# Altium PCB VMA_SAUVC26.PcbDoc
Units mm, origin at the board's own origin, x right, y up, seen from the top; angles counter-clockwise.
Board outline 50 x 35 mm, 4 copper layers (Top Layer 1, Top Layer, Bottom Layer, Bottom Layer 1), stack 1.502 mm thick; 96 components, 74 nets, 401 pads, 228 vias.
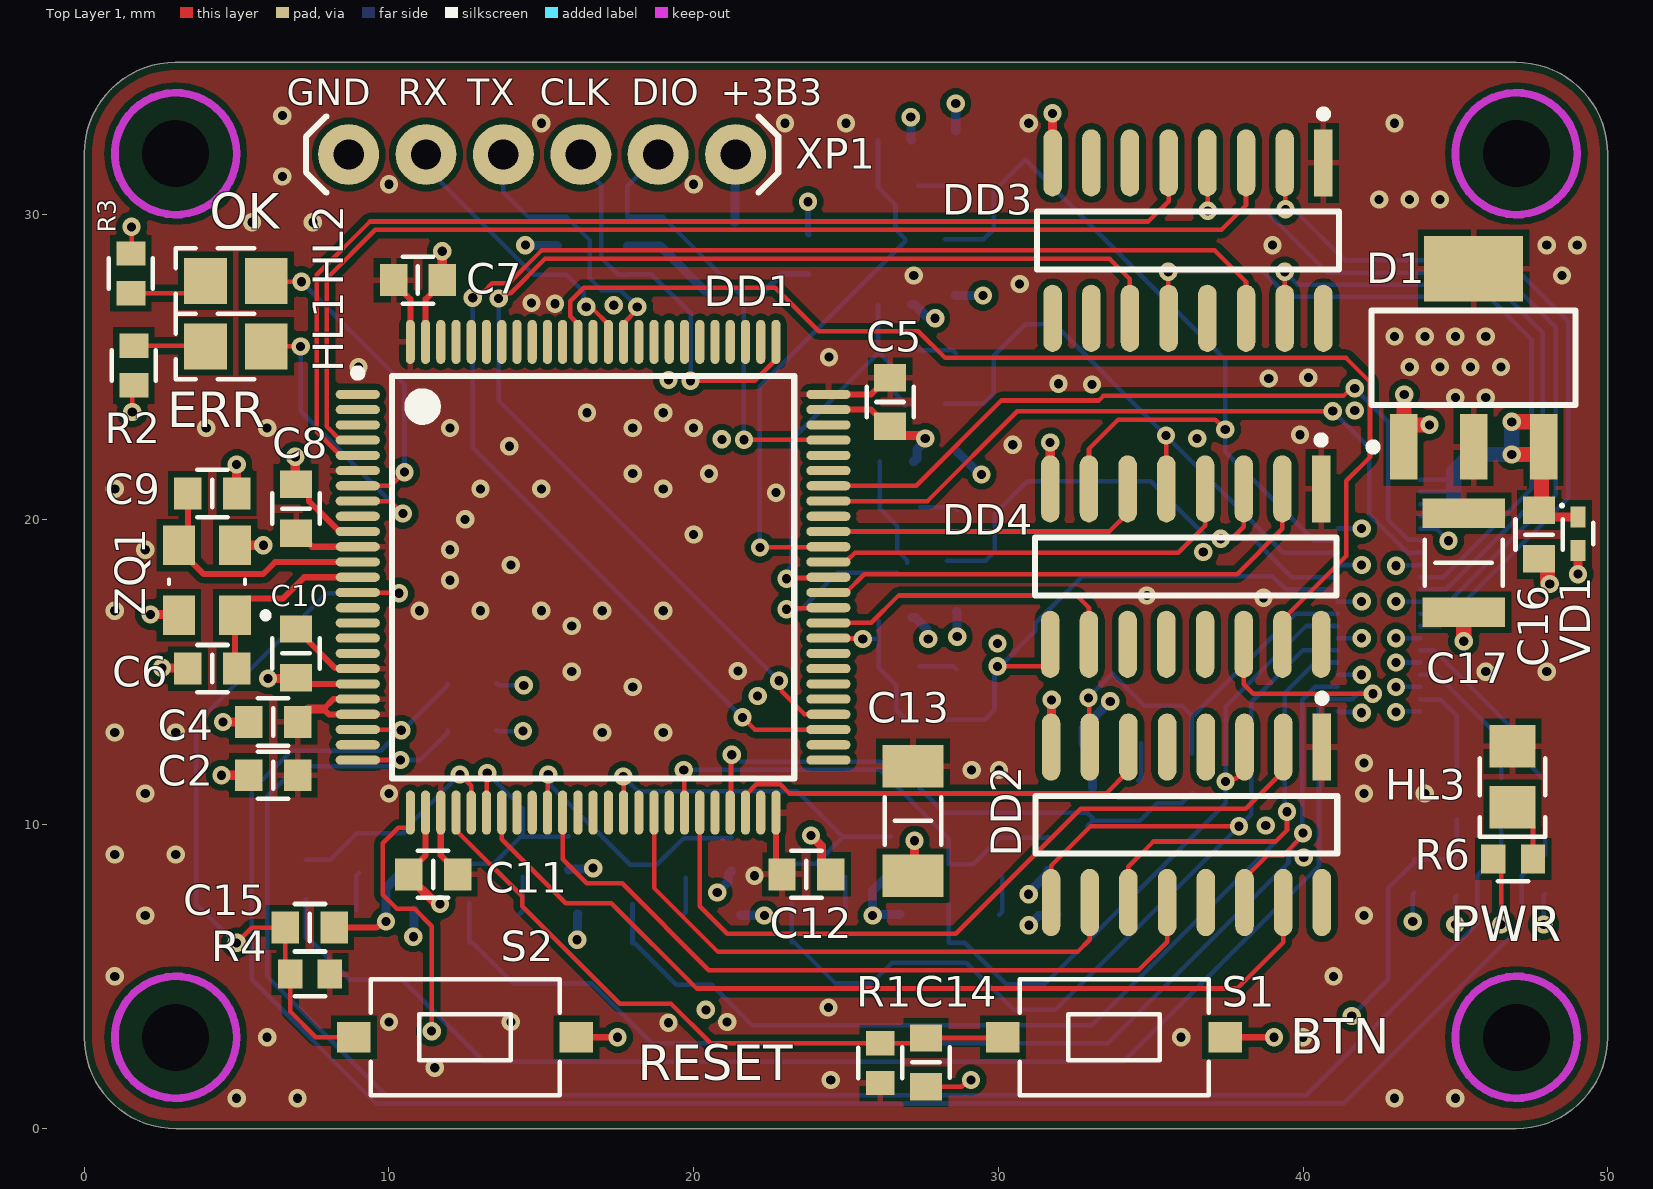
[diagram p0: Top Layer 1 view]
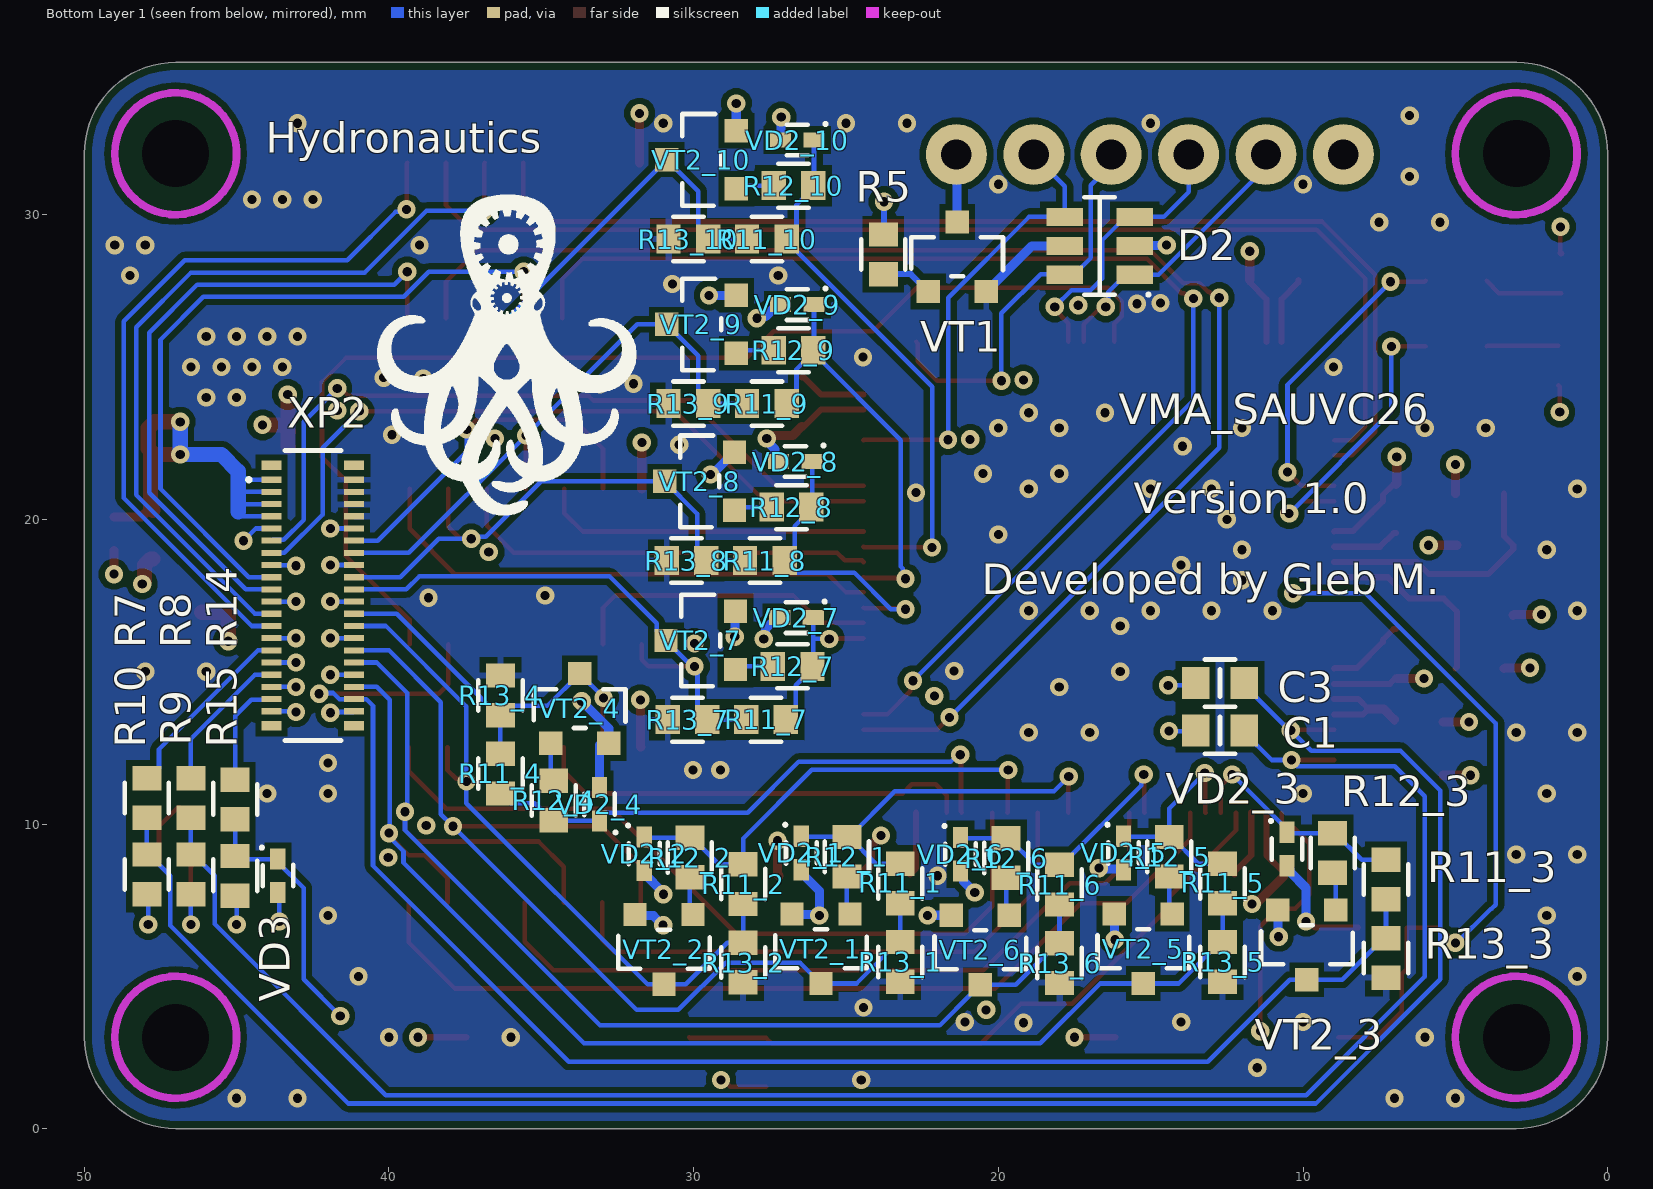
[diagram p1: Bottom Layer 1 view, seen from below]
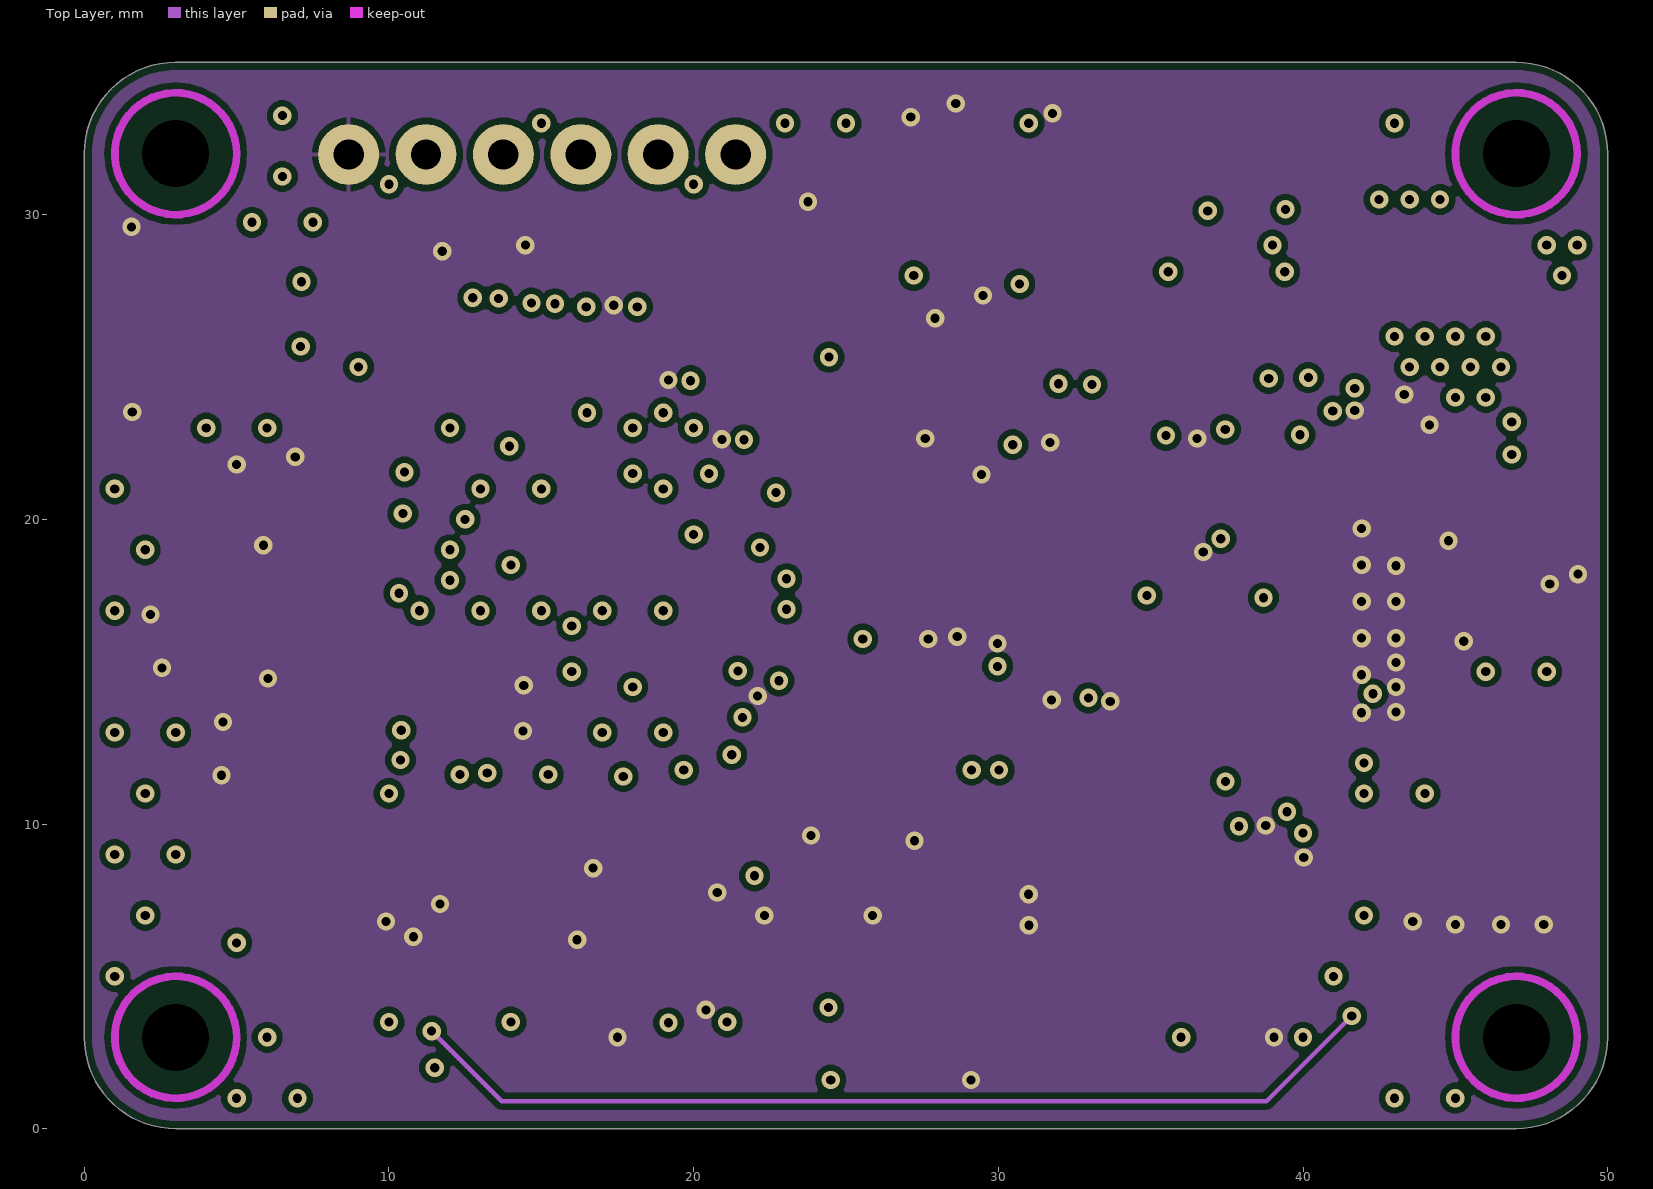
[diagram p2: Top Layer]
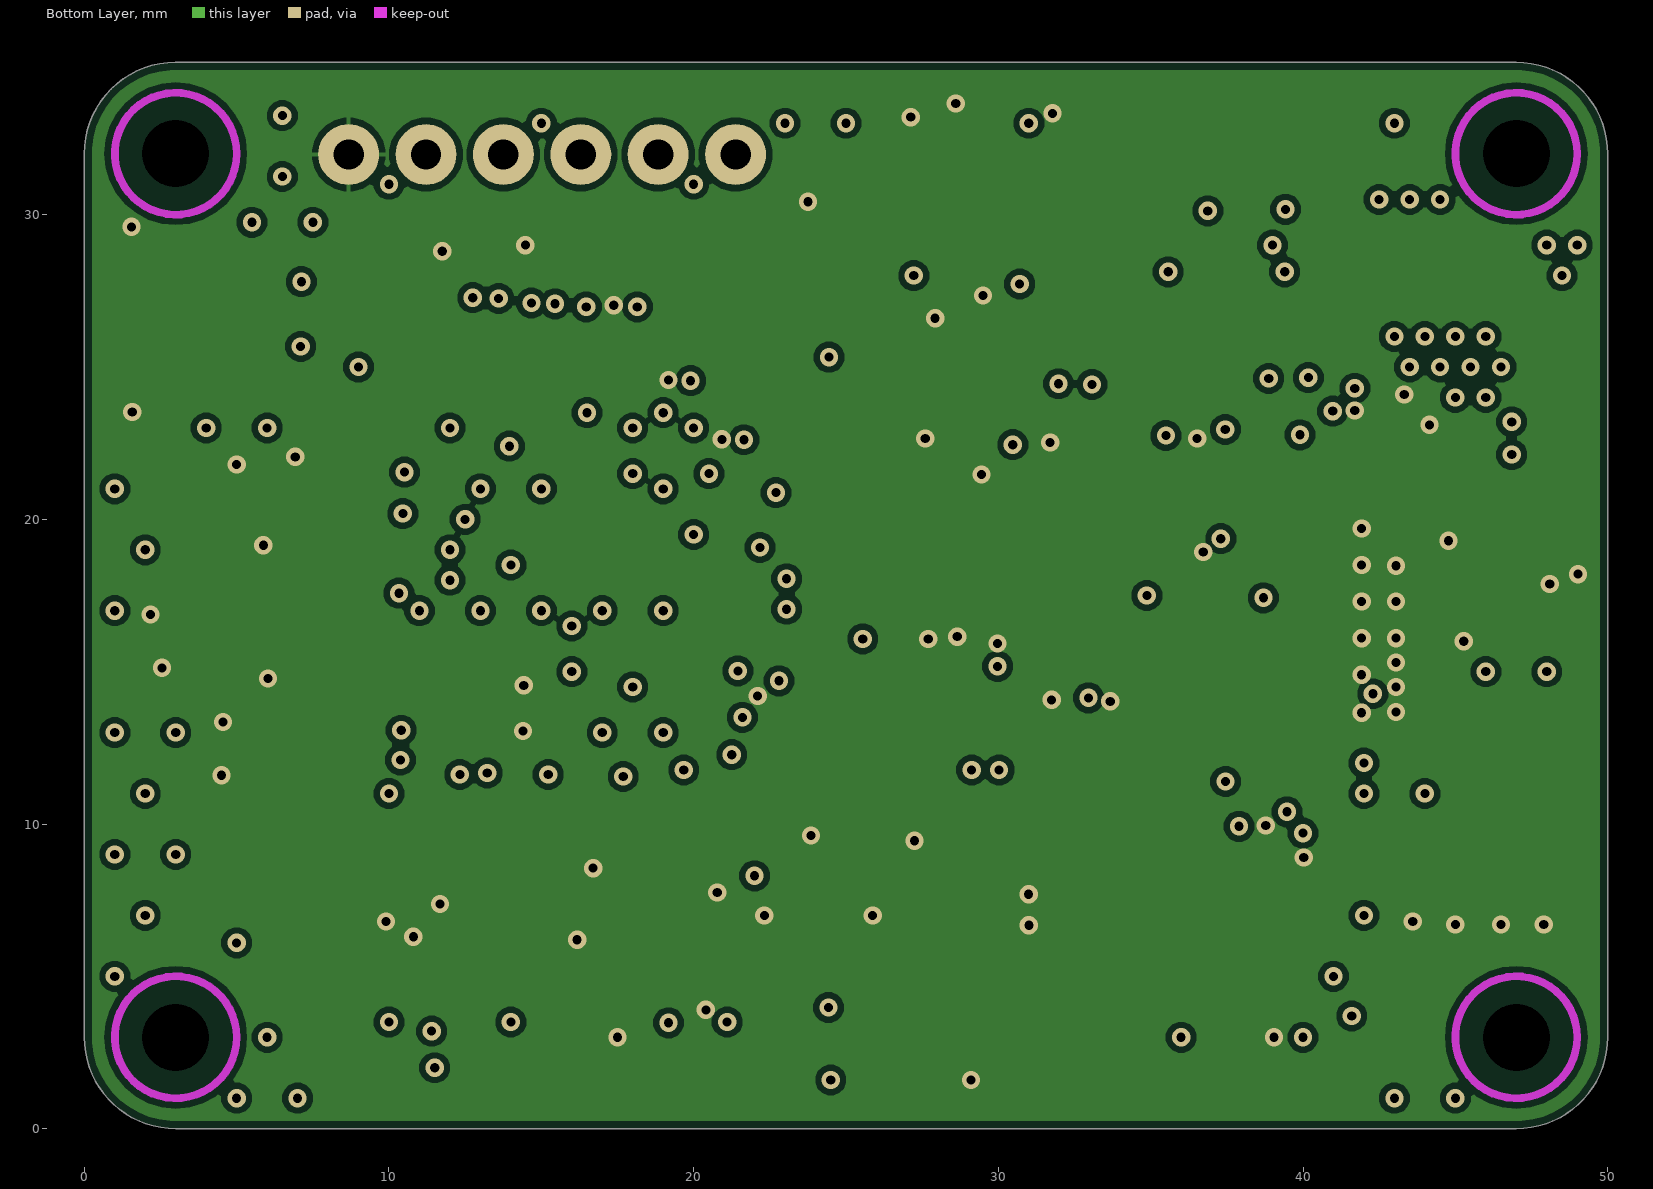
[diagram p3: Bottom Layer]

## Layer stack, top to bottom
Top Solder: solder mask 0.0102, Solder Resist, Dk 3.5
Top Layer 1: signal copper 0.018
Dielectric 2: prepreg 0.115, FR4, Dk 4.2
Top Layer: signal copper 0.018
Dielectric 1: core 1.2, FR4, Dk 4.6
Bottom Layer: signal copper 0.018
Dielectric 3: prepreg 0.115, FR4, Dk 4.2
Bottom Layer 1: signal copper 0.018
Bottom Solder: solder mask 0.0102, Solder Resist, Dk 3.5

## Board outline
3,0 cw(c3,3) 0,3 0,32 cw(c3,32) 3,35 47,35 cw(c47,32) 50,32 50,3 cw(c47,3) 47,0

## Design rules (kind name [scope] priority, off if disabled: settings)
AcuteAngle [All] p1: minimum=3.50000000000000E+0001 checktracksonly=FALSE
BoardOutlineClearance "BoardOutlineClearance 1" [All] p1: gap=0.25 ignorepadtopadclearanceinfootprint=FALSE except(0: Arc-SplitContinuation Track-SplitContinuation SMDPad-SplitContinuation THPad-SplitContinuation Via-SplitContinuation Fill-SplitContinuation Poly-SplitContinuation Region-SplitContinuation Text-SplitContinuation) // Milling
BoardOutlineClearance "BoardOutlineClearance 2" [All] p2: gap=0.4 ignorepadtopadclearanceinfootprint=FALSE except(0: Arc-SplitContinuation Track-SplitContinuation SMDPad-SplitContinuation THPad-SplitContinuation Via-SplitContinuation Fill-SplitContinuation Poly-SplitContinuation Region-SplitContinuation Text-SplitContinuation) // V-Cut
Clearance "Clearance-1 1/2 Oz" [All] p1: gap=0.125 ignorepadtopadclearanceinfootprint=FALSE except(0.2: Arc-Fill Arc-Poly Track-Fill Track-Poly SMDPad-SMDPad SMDPad-Fill SMDPad-Poly THPad-Fill THPad-Poly Via-Fill Via-Poly Fill-Fill Fill-Poly Poly-Poly Poly-Region Poly-Text; 0.25: Arc-Hole Track-Hole SMDPad-Hole THPad-Hole Via-Hole Fill-Hole Poly-Hole Region-Hole Text-Hole) // Standart
DiffPairsRouting "DiffPairsRouting 1/2 Oz" [All] p1: maxlimit=0.2 minlimit=0.125 mostfreqgap=0.125 toplayer_minwidth=0.125 toplayer_maxwidth=0.3 toplayer_prefwidth=0.2 midlayer1_minwidth=0.125 midlayer1_maxwidth=0.3 midlayer1_prefwidth=0.2 midlayer2_minwidth=0.125 midlayer2_maxwidth=0.3 midlayer2_prefwidth=0.2 bottomlayer_minwidth=0.125 bottomlayer_maxwidth=0.3 bottomlayer_prefwidth=0.2 maxuncoupledlength=12.7
HoleSize "Minimum HoleSize" [IsPad] p1: absolutevalues=TRUE maxlimit=5.9 minlimit=0.6 maxpercent=80.000 minpercent=20.000
HoleSize "Minimum HoleSize VIA 1" [IsVia] p2: absolutevalues=TRUE maxlimit=5.9 minlimit=0.3 maxpercent=80.000 minpercent=20.000 // Standart
HoleToHoleClearance Hole2HoleClearance [All] p1: gap=0.25 allowstackedmicrovias=FALSE
MinimumAnnularRing "Minimum AR VIA Standart" [IsVia] p1: minimumring=0.15
MinimumAnnularRing "Minimum AR PAD Standart" [IsPAD] p2: minimumring=0.2
MinimumSolderMaskSliver "SolderMask Bridge Standart" [All] p1: minsoldermaskwidth=0.149 // All Masks
PlaneClearance "PlaneClearance-1 1/2 Oz" [All] p1: clearance=0.2 // Standart
PlaneConnect "TermalConnect-1 1/2 Oz" [All] p1: pad.planeconnectstyle=Relief pad.reliefexpansion=0.2 pad.reliefentries=4 pad.reliefconductorwidth=0.2 pad.reliefairgap=0.2 via.planeconnectstyle=Direct via.reliefexpansion=0.2 via.reliefentries=4 via.reliefconductorwidth=0.2 via.reliefairgap=0.2 // Standart
PolygonConnect "PolygonConnect-1 1/2 Oz" [All] p1: thpad.connectstyle=Relief thpad.reliefconductorwidth=0.15 thpad.reliefentries=4 thpad.polygonreliefangle="90 Angle" thpad.airgapwidth=0.2 smdpad.connectstyle=Relief smdpad.reliefconductorwidth=0.2 smdpad.reliefentries=4 smdpad.polygonreliefangle="90 Angle" smdpad.airgapwidth=0.2 via.connectstyle=Direct via.reliefconductorwidth=0.254 via.reliefentries=4 via.polygonreliefangle="90 Angle" via.airgapwidth=0.254 // Standart
RoomDefinition Connectors [InComponentClass('Connectors')] p1 off: confinementstyle=ConfineIn formatcopy=TRUE lockcomponents=FALSE outline 37.25,8.25 49,8.25 49,29.2 37.25,29.2
RoomDefinition 10 [InComponentClass('10')] p2 off: confinementstyle=ConfineIn formatcopy=TRUE lockcomponents=TRUE outline 25.7,28.725 31.275,28.725 31.275,33.15 25.7,33.15
RoomDefinition 4 [InComponentClass('4')] p3 off: confinementstyle=ConfineIn formatcopy=TRUE lockcomponents=TRUE outline 36.816,9.75 36.816,15.325 32.391,15.325 32.391,9.75
RoomDefinition 2 [InComponentClass('2')] p4 off: confinementstyle=ConfineIn formatcopy=TRUE lockcomponents=TRUE outline 27.9,9.925 27.9,4.35 32.325,4.35 32.325,9.925
RoomDefinition 1 [InComponentClass('1')] p5 off: confinementstyle=ConfineIn formatcopy=TRUE lockcomponents=TRUE outline 22.745,9.95 22.745,4.375 27.17,4.375 27.17,9.95
RoomDefinition MCU [InComponentClass('MCU')] p6 off: confinementstyle=ConfineIn formatcopy=TRUE lockcomponents=FALSE outline 2.2,7.1 29.1,7.1 29.1,29.35 2.2,29.35
RoomDefinition 3 [InComponentClass('3')] p7 off: confinementstyle=ConfineIn formatcopy=TRUE lockcomponents=TRUE outline 6.8,10.075 6.8,4.5 11.225,4.5 11.225,10.075
RoomDefinition 5 [InComponentClass('5')] p8 off: confinementstyle=ConfineIn formatcopy=TRUE lockcomponents=TRUE outline 12.166,9.95 12.166,4.375 16.591,4.375 16.591,9.95
RoomDefinition 6 [InComponentClass('6')] p9 off: confinementstyle=ConfineIn formatcopy=TRUE lockcomponents=TRUE outline 17.517,9.908 17.517,4.333 21.942,4.333 21.942,9.908
RoomDefinition 7 [InComponentClass('7')] p10 off: confinementstyle=ConfineIn formatcopy=TRUE lockcomponents=TRUE outline 25.725,12.95 31.3,12.95 31.3,17.375 25.725,17.375
RoomDefinition 8 [InComponentClass('8')] p11 off: confinementstyle=ConfineIn formatcopy=TRUE lockcomponents=TRUE outline 25.764,18.173 31.339,18.173 31.339,22.598 25.764,22.598
RoomDefinition 9 [InComponentClass('9')] p12 off: confinementstyle=ConfineIn formatcopy=TRUE lockcomponents=TRUE outline 25.7,23.325 31.275,23.325 31.275,27.75 25.7,27.75
RoomDefinition Logic_IO_Protection [InComponentClass('Logic_IO_Protection')] p13 off: confinementstyle=ConfineIn formatcopy=TRUE lockcomponents=FALSE outline 41.5,5.75 41.5,33.75 30.75,33.75 30.75,5.75
RoutingCorners [All] p1 off: cornerstyle=45-Degree minsetback=2.54 maxsetback=2.54
RoutingVias [All] p1: holewidth=0.3 width=0.6 viastyle="Through Hole" minholewidth=0.3 minwidth=0.6 maxholewidth=0.3 maxwidth=0.6
SilkToSilkClearance Silk2SilkClearance [All] p1 off: silktosilkclearance=0.15
SilkToSolderMaskClearance Silk2SolderMaskClearance [IsPad] p1 off: minsilkscreentomaskgap=0.15 clearancetoexposedcopper=TRUE
SolderMaskExpansion [IsVia] p1: expansion=0.102 istentingtop=TRUE
SolderMaskExpansion "SolderMaskExpansion LDI" [All] p2: expansion=0.025 istentingtop=FALSE // Advance
SupplyNets "Schematic Supply Nets_2" [InNet('+5В')] p1: voltage=0.000
SupplyNets "Schematic Supply Nets_1" [InNet('GND')] p2: voltage=0.000
SupplyNets "Schematic Supply Nets" [InNet('+3,3В')] p3: voltage=0.000
UnRoutedNet [All] p1: checkbadconnections=TRUE
Width "Width 1/2 Oz" [All] p1: maxlimit=0.5 minlimit=0.125 preferedwidth=0.2 checkconnectedcopper=TRUE
20 further rules are at their usual default settings.

## Classes and differential pairs
channel class BDSHOT_TX: 1 2 3 4 5 6 7 8 9 10
net class PWM[1..4]: PWM1 PWM2 PWM3 PWM4
net class DSHOT_OUT[1..10]: DSHOT_OUT1 DSHOT_OUT2 DSHOT_OUT3 DSHOT_OUT4 DSHOT_OUT5 DSHOT_OUT6 DSHOT_OUT7 DSHOT_OUT8 DSHOT_OUT9 DSHOT_OUT10
net class DSHOT_IN[1..10]: DSHOT_IN1 DSHOT_IN2 DSHOT_IN3 DSHOT_IN4 DSHOT_IN5 DSHOT_IN6 DSHOT_IN7 DSHOT_IN8 DSHOT_IN9 DSHOT_IN10
net class BDSHOT[1..10]: BDSHOT1 BDSHOT2 BDSHOT3 BDSHOT4 BDSHOT5 BDSHOT6 BDSHOT7 BDSHOT8 BDSHOT9 BDSHOT10
net class ANALOG[1..2]: ANALOG1 ANALOG2
component class Logic_IO_Protection: DD2 DD3 DD4
component class Connectors: C16 C17 D1 D2 HL3 R5 R6 VD1 VT1 XP1 XP2
component class 10: R11_10 R12_10 R13_10 VD2_10 VT2_10
component class 9: R11_9 R12_9 R13_9 VD2_9 VT2_9
component class 8: R11_8 R12_8 R13_8 VD2_8 VT2_8
component class 7: R11_7 R12_7 R13_7 VD2_7 VT2_7
component class 6: R11_6 R12_6 R13_6 VD2_6 VT2_6
component class 5: R11_5 R12_5 R13_5 VD2_5 VT2_5
component class 4: R11_4 R12_4 R13_4 VD2_4 VT2_4
component class 3: R11_3 R12_3 R13_3 VD2_3 VT2_3
component class 2: R11_2 R12_2 R13_2 VD2_2 VT2_2
component class 1: R11_1 R12_1 R13_1 VD2_1 VT2_1
net class TIM12_CH[1..2]: TIM12_CH1 TIM12_CH2
net class TIM9_CH[1..2]: TIM9_CH1 TIM9_CH2
component class MCU: 2 C1 C2 C3 C4 C5 C6 C7 C8 C9 C10 C11 C12 C13 C14 C15 DD1 HL1 HL2 R1 R2 R3 R4 S1 S2 ZQ1

## Components (designator, comment, footprint, x,y, rotation, side; value= is the part's Value field where it differs from the comment)
C1 "Capacitor" 0603C 12.725,13.075 r180 bottom value="0,1 мк"
C2 "Capacitor" 0603C 6.2,11.6 r0 top value="1 мк"
C3 "Capacitor" 0603C 12.725,14.625 r180 bottom value="0,1 мк"
C4 "Capacitor" 0603C 6.2,13.35 r0 top value="0,1 мк"
C5 "Capacitor" 0603C 26.45,23.85 r90 top value="0,1 мк"
C6 "Capacitor" 0603C 4.2,15.1 r0 top value="12 п"
C7 "Capacitor" 0603C 10.95,27.85 r180 top value="0,1 мк"
C8 "Capacitor" 0603C 6.95,20.35 r270 top value="0,1 мк"
C9 "Capacitor" 0603C 4.2,20.85 r180 top value="12 п"
C10 "Capacitor" 0603C 6.95,15.6 r90 top value="0,1 мк"
C11 "Capacitor" 0603C 11.45,8.35 r0 top value="0,1 мк"
C12 "Capacitor" 0603C 23.7,8.35 r180 top value="0,1 мк"
C13 "Capacitor" 1206C 27.2,10.1 r90 top value="4,7 мк"
C14 "Capacitor" 0603C 27.625,2.175 r90 top value="0,1 мк"
C15 "Capacitor" 0603C 7.4,6.6 r180 top value="0,1 мк"
C16 "Capacitor" 0603C 47.75,19.5 r90 top value="0,1 мк"
C17 "Capacitor" 1210C 45.275,18.575 r90 top value="10 мк"
D1 "LD1117S33CTR" SOT223 45.6,25.3 r90 top
D2 "USBLC6-4" SOT23-6 16.675,28.975 r90 bottom
DD1 "STM32F407VGT6" LQFP100 16.7,18.1 r0 top
DD2 "CD4050B" SOIC-16 36.175,9.975 r270 top
DD3 "CD4050B" SOIC-16 36.225,29.15 r270 top
DD4 "CD4050B" SOIC-16 36.15,18.45 r270 top
HL1 "LED" 0805D 4.975,25.675 r180 top
HL2 "LED" 0805D 4.975,27.825 r180 top
HL3 "LED" 0805D 46.875,11.55 r270 top
R1 "Resistor" 0603R 26.125,2.15 r270 top value="10 к"
R2 "Resistor" 0603R 1.625,25.05 r90 top value="1,0 к"
R3 "Resistor" 0603R 1.525,28.075 r270 top value="1,0 к"
R4 "Resistor" 0603R 7.405,5.075 r0 top value="10 к"
R5 "Resistor" 0603R 23.775,28.7 r270 bottom value="10 к"
R6 "Resistor" 0603R 46.9,8.85 r0 top value="1,0 к"
R7 "Resistor" 0603R 47.95,10.85 r270 bottom value="10 к"
R8 "Resistor" 0603R 46.5,10.85 r270 bottom value="10 к"
R9 "Resistor" 0603R 46.5,8.35 r90 bottom value="1,0 к"
R10 "Resistor" 0603R 47.95,8.35 r90 bottom value="1,0 к"
R11_1 "Resistor" 0603R 23.22,8.05 r270 bottom value=10 (schematic designator R11)
R11_2 "Resistor" 0603R 28.375,8.025 r270 bottom value=10 (schematic designator R11)
R11_3 "Resistor" 0603R 7.275,8.175 r270 bottom value=10 (schematic designator R11)
R11_4 "Resistor" 0603R 36.341,11.65 r90 bottom value=10 (schematic designator R11)
R11_5 "Resistor" 0603R 12.641,8.05 r270 bottom value=10 (schematic designator R11)
R11_6 "Resistor" 0603R 17.992,8.008 r270 bottom value=10 (schematic designator R11)
R11_7 "Resistor" 0603R 27.625,13.425 r0 bottom value=10 (schematic designator R11)
R11_8 "Resistor" 0603R 27.664,18.648 r0 bottom value=10 (schematic designator R11)
R11_9 "Resistor" 0603R 27.6,23.8 r0 bottom value=10 (schematic designator R11)
R11_10 "Resistor" 0603R 27.6,29.2 r0 bottom value=10 (schematic designator R11)
R12_1 "Resistor" 0603R 24.97,8.925 r270 bottom value="10 к" (schematic designator R12)
R12_2 "Resistor" 0603R 30.125,8.9 r270 bottom value="10 к" (schematic designator R12)
R12_3 "Resistor" 0603R 9.025,9.05 r270 bottom value="10 к" (schematic designator R12)
R12_4 "Resistor" 0603R 34.591,10.775 r90 bottom value="10 к" (schematic designator R12)
R12_5 "Resistor" 0603R 14.391,8.925 r270 bottom value="10 к" (schematic designator R12)
R12_6 "Resistor" 0603R 19.742,8.883 r270 bottom value="10 к" (schematic designator R12)
R12_7 "Resistor" 0603R 26.75,15.175 r0 bottom value="10 к" (schematic designator R12)
R12_8 "Resistor" 0603R 26.789,20.398 r0 bottom value="10 к" (schematic designator R12)
R12_9 "Resistor" 0603R 26.725,25.55 r0 bottom value="10 к" (schematic designator R12)
R12_10 "Resistor" 0603R 26.725,30.95 r0 bottom value="10 к" (schematic designator R12)
R13_1 "Resistor" 0603R 23.22,5.475 r270 bottom value=680 (schematic designator R13)
R13_2 "Resistor" 0603R 28.375,5.45 r270 bottom value=680 (schematic designator R13)
R13_3 "Resistor" 0603R 7.275,5.6 r270 bottom value=680 (schematic designator R13)
R13_4 "Resistor" 0603R 36.341,14.225 r90 bottom value=680 (schematic designator R13)
R13_5 "Resistor" 0603R 12.641,5.475 r270 bottom value=680 (schematic designator R13)
R13_6 "Resistor" 0603R 17.992,5.433 r270 bottom value=680 (schematic designator R13)
R13_7 "Resistor" 0603R 30.2,13.425 r0 bottom value=680 (schematic designator R13)
R13_8 "Resistor" 0603R 30.239,18.648 r0 bottom value=680 (schematic designator R13)
R13_9 "Resistor" 0603R 30.175,23.8 r0 bottom value=680 (schematic designator R13)
R13_10 "Resistor" 0603R 30.175,29.2 r0 bottom value=680 (schematic designator R13)
R14 "Resistor" 0603R 45.05,10.8 r270 bottom value="10 к"
R15 "Resistor" 0603R 45.05,8.3 r90 bottom value="20 к"
S1 "TSS-TD-19XA-XTR" TSS-TD-19XA-XTR 33.8,3 r0 top
S2 "TSS-TD-19XA-XTR" TSS-TD-19XA-XTR 12.5,3 r0 top
VD1 "PESD5V0S1UB" SOD523 49.025,19.525 r90 top value="5 В"
VD2_1 "PESD3V3L1UB" SOD523 26.47,9.05 r90 bottom value="3,3 В" (schematic designator VD2)
VD2_2 "PESD3V3L1UB" SOD523 31.625,9.025 r90 bottom value="3,3 В" (schematic designator VD2)
VD2_3 "PESD3V3L1UB" SOD523 10.525,9.175 r90 bottom value="3,3 В" (schematic designator VD2)
VD2_4 "PESD3V3L1UB" SOD523 33.091,10.65 r270 bottom value="3,3 В" (schematic designator VD2)
VD2_5 "PESD3V3L1UB" SOD523 15.891,9.05 r90 bottom value="3,3 В" (schematic designator VD2)
VD2_6 "PESD3V3L1UB" SOD523 21.242,9.008 r90 bottom value="3,3 В" (schematic designator VD2)
VD2_7 "PESD3V3L1UB" SOD523 26.625,16.775 r180 bottom value="3,3 В" (schematic designator VD2)
VD2_8 "PESD3V3L1UB" SOD523 26.664,21.898 r180 bottom value="3,3 В" (schematic designator VD2)
VD2_9 "PESD3V3L1UB" SOD523 26.6,27.05 r180 bottom value="3,3 В" (schematic designator VD2)
VD2_10 "PESD3V3L1UB" SOD523 26.6,32.45 r180 bottom value="3,3 В" (schematic designator VD2)
VD3 "PESD3V3L1UB" SOD523 43.65,8.3 r90 bottom value="3,3 В"
VT1 "AO3401A" SOT23-3 21.35,28.6 r90 bottom
VT2_1 "AO3400A" SOT23-3 25.82,5.925 r270 bottom (schematic designator VT2)
VT2_2 "AO3400A" SOT23-3 30.975,5.9 r270 bottom (schematic designator VT2)
VT2_3 "AO3400A" SOT23-3 9.875,6.05 r270 bottom (schematic designator VT2)
VT2_4 "AO3400A" SOT23-3 33.741,13.775 r90 bottom (schematic designator VT2)
VT2_5 "AO3400A" SOT23-3 15.241,5.925 r270 bottom (schematic designator VT2)
VT2_6 "AO3400A" SOT23-3 20.592,5.883 r270 bottom (schematic designator VT2)
VT2_7 "AO3400A" SOT23-3 29.75,16.025 r0 bottom (schematic designator VT2)
VT2_8 "AO3400A" SOT23-3 29.789,21.248 r0 bottom (schematic designator VT2)
VT2_9 "AO3400A" SOT23-3 29.725,26.4 r0 bottom (schematic designator VT2)
VT2_10 "AO3400A" SOT23-3 29.725,31.8 r0 bottom (schematic designator VT2)
XP1 "PLS-6" PLS6 21.375,31.975 r270 top
XP2 "DF40C-40DP" DF40C-40DP 42.5,17.5 r270 bottom locked
ZQ1 "XTAL_GND" QSMD3.2x2.5 4.95,16.85 r180 top value="8 МГц"

## Footprints (in the part's own frame and the unit in brackets; to place one, negate y for a bottom-side part, rotate by r counter-clockwise, add the part's x,y. Pads: shape width x height; smd on the part's side, far side on the other; paste and mask are expansions set on the pad)
0603C [mm] "Chip Resistor, 2-Leads, Body 1,40x0,80mm, IPC Medium Density"
  rect 0.9x1.05 smd: 1(-0.8,0) 2(0.8,0)
  silkscreen extent -0.5,-0.77 0.5,0.77, body extent -0.85,-0.45 0.85,0.45, height 0.9
0603R [mm] "Chip Resistor, 2-Leads, Body 1.60x0.85mm, IPC Medium Density"
  rect 0.8x0.95 smd: 1(-0.65,0) 2(0.65,0)
  silkscreen extent -0.5,-0.72 0.5,0.72, body extent -0.87,-0.47 0.88,0.48, height 0.9
0805D [mm]
  rect 1.4x1.5 smd: 1(-1,0) 2(1,0)
  silkscreen extent -0.6,-1.07 1.97,1.07, body extent -1.07,-0.7 1.07,0.7, height 0.7
1206C [mm]
  rect 1.4x2 smd paste+0: 1(-1.8,0) 2(1.8,0)
  silkscreen extent -0.77,-0.92 0.77,0.92, body extent -1.6,-0.74 1.6,0.86, height 1.59
1210C [mm]
  rect 0.954x2.706 smd paste+0: 1(-1.625,0) 2(1.625,0)
  silkscreen extent -0.75,-1.28 0.75,1.28, body extent -2.35,-1.6 2.35,1.6, height 0.25
DF40C-40DP [mm]
  rect 0.2x0.66 smd: 1(-3.8,-1.355) 2(-3.8,1.355) 3(-3.4,-1.355) 4(-3.4,1.355) 5(-3,-1.355) 6(-3,1.355) 7(-2.6,-1.355) 8(-2.6,1.355) 9(-2.2,-1.355) 10(-2.2,1.355) 11(-1.8,-1.355) 12(-1.8,1.355) 13(-1.4,-1.355) 14(-1.4,1.355) 15(-1,-1.355) 16(-1,1.355) 17(-0.6,-1.355) 18(-0.6,1.355) 19(-0.2,-1.355) 20(-0.2,1.355) 21(0.2,-1.355) 22(0.2,1.355) 23(0.6,-1.355) 24(0.6,1.355) 25(1,-1.355) 26(1,1.355) 27(1.4,-1.355) 28(1.4,1.355) 29(1.8,-1.355) 30(1.8,1.355) 31(2.2,-1.355) 32(2.2,1.355) 33(2.6,-1.355) 34(2.6,1.355) 35(3,-1.355) 36(3,1.355) 37(3.4,-1.355) 38(3.4,1.355) 39(3.8,-1.355) 40(3.8,1.355)
  rect 0.32x0.66 smd: S1(-4.275,-1.355) S2(-4.275,1.355) S3(4.275,-1.355) S4(4.275,1.355)
  silkscreen extent -4.76,-2.16 4.76,0.92, body extent -4.76,-1.45 4.76,1.52, height 1.14
LQFP100 [mm] "TSQFP, 100-Leads, Body 14,00x14,00mm, Pitch 0,50mm, IPC Medium Density"
  oval 1.45x0.3 smd: 1(-7.725,6) 2(-7.725,5.5) 3(-7.725,5) 4(-7.725,4.5) 5(-7.725,4) 6(-7.725,3.5) 7(-7.725,3) 8(-7.725,2.5) 9(-7.725,2) 10(-7.725,1.5) 11(-7.725,1) 12(-7.725,0.5) 13(-7.725,0) 14(-7.725,-0.5) 15(-7.725,-1) 16(-7.725,-1.5) 17(-7.725,-2) 18(-7.725,-2.5) 19(-7.725,-3) 20(-7.725,-3.5) 21(-7.725,-4) 22(-7.725,-4.5) 23(-7.725,-5) 24(-7.725,-5.5) 25(-7.725,-6) 51(7.725,-6) 52(7.725,-5.5) 53(7.725,-5) 54(7.725,-4.5) 55(7.725,-4) 56(7.725,-3.5) 57(7.725,-3) 58(7.725,-2.5) 59(7.725,-2) 60(7.725,-1.5) 61(7.725,-1) 62(7.725,-0.5) 63(7.725,0) 64(7.725,0.5) 65(7.725,1) 66(7.725,1.5) 67(7.725,2) 68(7.725,2.5) 69(7.725,3) 70(7.725,3.5) 71(7.725,4) 72(7.725,4.5) 73(7.725,5) 74(7.725,5.5) 75(7.725,6)
  oval 0.3x1.45 smd: 26(-6,-7.725) 27(-5.5,-7.725) 28(-5,-7.725) 29(-4.5,-7.725) 30(-4,-7.725) 31(-3.5,-7.725) 32(-3,-7.725) 33(-2.5,-7.725) 34(-2,-7.725) 35(-1.5,-7.725) 36(-1,-7.725) 37(-0.5,-7.725) 38(0,-7.725) 39(0.5,-7.725) 40(1,-7.725) 41(1.5,-7.725) 42(2,-7.725) 43(2.5,-7.725) 44(3,-7.725) 45(3.5,-7.725) 46(4,-7.725) 47(4.5,-7.725) 48(5,-7.725) 49(5.5,-7.725) 50(6,-7.725) 76(6,7.725) 77(5.5,7.725) 78(5,7.725) 79(4.5,7.725) 80(4,7.725) 81(3.5,7.725) 82(3,7.725) 83(2.5,7.725) 84(2,7.725) 85(1.5,7.725) 86(1,7.725) 87(0.5,7.725) 88(0,7.725) 89(-0.5,7.725) 90(-1,7.725) 91(-1.5,7.725) 92(-2,7.725) 93(-2.5,7.725) 94(-3,7.725) 95(-3.5,7.725) 96(-4,7.725) 97(-4.5,7.725) 98(-5,7.725) 99(-5.5,7.725) 100(-6,7.725)
  silkscreen extent -7.85,-6.6 6.6,6.82, body extent -8,-8 8,8, height 1.6
PLS6 [mm]
  round 2 hole 1: 1(0,0) 2(0,-2.54) 3(0,-5.08) 4(0,-7.62) 5(0,-10.16) 6(0,-12.7)
  silkscreen extent -1.25,-14.1 1.25,1.4, body extent -1.27,-13.97 1.27,1.27, height 8.44
QSMD3.2x2.5 [mm] "Кварцевый резонатор"
  rect 1.05x1.3 smd: 1(0,0) 2(1.85,-2.3) 3(0,-2.3) 3(1.85,0)
  silkscreen extent -1.1,-1.18 2.18,0.1, body extent -0.32,-2.75 2.18,0.45, height 0.8
SOD523 [mm]
  rect 0.7x0.5 smd: 1(-0.55,0) 2(0.55,0)
  silkscreen extent -0.35,-0.51 0.97,0.57, body extent -0.8,-0.4 0.8,0.4, height 0.65
SOIC-16 [mm] "SOT109-1"
  rect 2.204x0.608 smd: 1(-2.551,4.445)
  rrect100% 2.204x0.608 smd: 2(-2.551,3.175) 3(-2.551,1.905) 4(-2.551,0.635) 5(-2.551,-0.635) 6(-2.551,-1.905) 7(-2.551,-3.175) 8(-2.551,-4.445) 9(2.551,-4.445) 10(2.551,-3.175) 11(2.551,-1.905) 12(2.551,-0.635) 13(2.551,0.635) 14(2.551,1.905) 15(2.551,3.175) 16(2.551,4.445)
  silkscreen extent -4.28,-4.95 0.95,4.95, body extent -4.15,-5.45 4.15,5.45, height 0.25
SOT23-3 [mil]
  rect 30x30 smd: 1(-44.29,37.4) 2(-44.29,-37.6) 3(45.71,-0.1)
  silkscreen extent -25,-59 26,59, body extent -48,-60 50,59, height 41
SOT23-6 [mm]
  rect 0.6x1.2 smd: 1(-0.95,-1.15) 2(0,-1.15) 3(0.95,-1.15) 4(0.95,1.15) 5(0,1.15) 6(-0.95,1.15)
  silkscreen extent -1.65,-1.65 1.6,0.5, body extent -1.46,-1.4 1.46,1.4, height 1.4
SOT223 [mm] "SOT223, ld1117"
  rect 2.15x0.9 smd: 1(-2.925,2.3) 2(-2.925,0) 3(-2.925,-2.3)
  rect 2.15x3.25 smd: 2(2.925,0)
  silkscreen extent -3.05,-3.35 1.55,3.42, body extent -3.56,-3.3 3.51,3.2, height 1.6
TSS-TD-19XA-XTR [mm]
  rect 1.1x1 smd: 1(-3.65,0) 2(3.65,0)
  silkscreen extent -3.1,-1.9 3.1,1.9, body extent -4.05,-1.85 4.05,1.85, height 2.55

## Part data
C1 C3 C4 C5 C7 C8 C10 C11 C12 C14 C15 C16: library part Capacitor_0,1u_10_50V_X7R_0603C, "Конденсатор", Capacity (nF)=100, Dielectric=X7R, Tolerance=0,1, Voltage (V)=50, Library Path2=Schematic\Capacitor.SchLib, Part Number=Capacitor_0,1u_10_50V_X7R_0603C
C2: library part Capacitor_1u_10_50V_X7R_0603C, "Конденсатор", Capacity (nF)=1000, Dielectric=X7R, Tolerance=0,1, Voltage (V)=50, Library Path2=Schematic\Capacitor.SchLib, Part Number=Capacitor_1u_10_50V_X7R_0603C
C6 C9: library part "0,1 мк", "Конденсатор 12п", Part Number=Capacitor
C13: library part Capacitor_4,7u_10_50V_X7R_1206C, "Конденсатор", Capacity (nF)=4700, Dielectric=X7R, Tolerance=0,1, Voltage (V)=50, Library Path2=Schematic\Capacitor.SchLib, Part Number=Capacitor_4,7u_10_50V_X7R_1206C
C17: library part Capacitor_10u_10_35V_X7R_1210C, "Конденсатор", Capacity (nF)=10000, Dielectric=X7R, Tolerance=0,1, Voltage (V)=35, Library Path2=Schematic\Capacitor.SchLib, Part Number=Capacitor_10u_10_35V_X7R_1210C
D1: "Линейный стабилизатор напряжения", Part Number=LD1117S33CTR
D2: "Сборка защитных диодов для USB", ComponentLink1Description=Shop, ComponentLink1URL=https://www.chipdip.ru/product0/8001780508, Part Number=USBLC6-4
DD1: "Микроконтроллер", Part Number=STM32F407VGT6
DD2 DD3 DD4: "Шесть буферных элементов", Part Number=CD4050B
HL1 HL3: "Светодиод", Color=Красный, Part Number=LED
HL2: "Светодиод", Color=Зеленый, Part Number=LED
R1 R4 R5 R7 R8 R12_1 R12_2 R12_3 R12_4 R12_5 R12_6 R12_7 R12_8 R12_9 R12_10: library part Resistor_10k_1_0603, "Резистор номиналом 10 кОм и точностью 1%", Tolerance=1%, Part Number=Resistor_10k_1_0603
R2 R3 R6 R9 R10: library part Resistor_1.0k_1_0603, "Резистор номиналом 1,0 кОм и точностью 1%", Tolerance=1%, Part Number=Resistor_1.0k_1_0603
R11_1 R11_2 R11_3 R11_4 R11_5 R11_6 R11_7 R11_8 R11_9 R11_10: library part Resistor_10_1_0603, "Резистор номиналом 10 Ом и точностью 1%", Tolerance=1%, Part Number=Resistor_10_1_0603
R13_1 R13_2 R13_3 R13_4 R13_5 R13_6 R13_7 R13_8 R13_9 R13_10: library part Resistor_680_1_0603, "Резистор номиналом 680 Ом и точностью 1%", Tolerance=1%, Part Number=Resistor_680_1_0603
R14: library part Resistor_10k_1_0603, "Резистор номиналом 10 кОм 1%", Tolerance=1%, Part Number=Resistor_10k_1_0603
R15: library part Resistor_20k_1_0603, "Резистор номиналом 20 кОм 1%", Tolerance=1%, Part Number=Resistor_20k_1_0603
S1 S2: "Тактовая кнопка", Part Number=TSS-TD-19XA-XTR
VD1: "Защитный диод на 5 В, рассеиваемая мощность 330 Вт", Power (W)=330, Voltage nominal (V)=5, Part Number=PESD5V0S1UB
VD2_1 VD2_2 VD2_3 VD2_4 VD2_5 VD2_6 VD2_7 VD2_8 VD2_9 VD2_10 VD3: "Защитный диод на 3,3 В, рассеиваемая мощность 45 Вт", Power (W)=45, Voltage nominal (V)=3,3, Part Number=PESD3V3L1UB
  VD3: Автор=glebmih
VT1: "P-канальный MOSFET", Part Number=AO3401A
VT2_1 VT2_2 VT2_3 VT2_4 VT2_5 VT2_6 VT2_7 VT2_8 VT2_9 VT2_10: "N-канальный MOSFET", Part Number=AO3400A
XP1: "Гребенка 6 пинов", Value1=+3,3В, Value2=SWDIO, Value3=SWCLOCK, Value4=UART_TX, Value5=UART_RX, Value6=GND, Part Number=PLS-6, System=Connector
XP2: "Разъем плата-плата 40 пинов, мама, шаг 0.4мм", Value1=+5В, Value5=GND, Value6=UART1_RX, Value7=UART1_TX, Value9=PWM4, Value10=PWM3, Value12=PWM2, Value13=PWM1, Value15=Vbat1, Value17=Vbat2, Value19=DIG_INP, Part Number=DF40C-40DP, System=Connector, Value2=+5В, Value3=+5В, Value4=+5В, Value8=GND, Value11=GND, Value14=GND, Value16=GND, Value18=GND, Value20=GND
ZQ1: "Кварцевый резонатор с входом земли", Part Number=XTAL_GND

## Free pads (board coordinates)
  round 0 hole 2.2 unplated mask+1.2: 4(3,3) 4(3,32) 4(47,3) 4(47,32)

## Via types
v1: diameter 0.6, hole 0.3, Top Layer 1 to Bottom Layer 1, tented both sides, 228 vias

## Nets (pads, with @x,y where several pads share a name; then routed paths per layer and width w, separated by ;. In a path a pad name is that pad's centre, name@x,y a point inside that pad or via, vN(x,y) a via of type N, cw(c..) or ccw(c..) an arc to the next point about the centre after c; other vN are vias at no path point)
+3,3В: C2.2 C4.2 C5.2 C7.2 C8.2 C10.2 C11.2 C12.2 C13.2 C17.2 D1.2 D2.5 DD1.6 DD1.11 DD1.19 DD1.21 DD1.22 DD1.28 DD1.50 DD1.75 DD1.100 DD2.1 DD3.1 DD4.1 HL3.1 R1.2 R4.2 R13_1.2 R13_2.2 R13_3.2 R13_4.2 R13_5.2 R13_6.2 R13_7.2 R13_8.2 R13_9.2 R13_10.2 VT1.2 XP2.2 XP2.4 XP2.6 XP2.8 | length 20.5
  Top Layer 1 w0.2: C10.2 7.025,16.4 7.375,16.05 7.375,15.975 8.231,15.119 8.956,15.119 DD1.19 ; C8.2 7.025,19.55 7.475,19.1 DD1.11 ; C4.2 C4.2@7,13.425 ; DD1.22 8.025,13.6 7.85,13.775 8.175,14.1 DD1.21 ; C7.2 10.15,27.775 10.7,27.225 DD1.100 ; DD1.28 11.7,8.975 12.25,8.425 C11.2 ; DD1.50 22.7,8.55 22.8,8.45 C12.2 ; DD1.75 25.825,24.1 26.375,24.65 C5.2
  Top Layer 1 w0.3: C4.2@7,13.425 7.35,13.775 7.85,13.775
  Bottom Layer 1 w0.2: D2.5 D2.5@17.875,28.925
  Bottom Layer 1 w0.3: D2.5 18.895,28.975 VT1.2
  other v1: 5,1 7,1 43,1 45,1 24.5,1.6 11.5,2 6,3 36,3 40,3 19.175,3.475 10,3.5 14,3.5 21.1,3.5 24.425,3.975 1,5 41,5 2,7 42,7 22,8.3 1,9 3,9 2,11 10,11 42,11 44,11 29.125,11.775 30.025,11.775 42,12 1,13 3,13 17,13 19,13 18,14.5 16,15 46,15 48,15 21.45,15.025 16,16.5 1,17 11,17 13,17 15,17 17,17 19,17 38.7,17.425 34.875,17.5 12,18 14,18.5 2,19 12,19 20,19.5 12.5,20 22.7,20.875 1,21 13,21 15,21 19,21 18,21.5 20.5,21.5 13.95,22.4 30.475,22.45 39.9,22.775 4,23 6,23 12,23 18,23 20,23 16.5,23.5 19,23.5 45,24 46,24 33.075,24.425 31.975,24.45 38.875,24.625 40.175,24.65 9,25 43.5,25 44.5,25 45.5,25 46.5,25 24.442,25.324 43,26 44,26 45,26 46,26 15.45,27.075 14.675,27.1 30.7,27.725 27.225,28 48.5,28 39,29 48,29 49,29 5.5,29.75 7.5,29.75 42.5,30.5 43.5,30.5 44.5,30.5 10,31 20,31 6.5,31.25 15,33 23,33 25,33 31,33 43,33 6.5,33.25
+5В: C16.2 D1.3 VD1.2 XP2.1 XP2.3 XP2.5 XP2.7 | length 15.4
  Top Layer 1 w0.3: C16.2@47.825,20.375 48.125,20.075 VD1.2
  Top Layer 1 w0.5: v1(46.85,22.125) 47.7,22.125 D1.3@47.825,22.25 ; v1(46.85,23.2) 47.7,23.2 47.9,23 D1.3 47.9,22.325 D1.3@47.825,22.25 ; C16.2 47.825,20.375 D1.3@47.825,22.25
  Bottom Layer 1 w0.15: XP2.7 44.8,20.1 44.95,20.25 ; XP2.5 44.869,20.5 44.95,20.581 ; XP2.3 44.937,20.9 44.95,20.913 ; XP2.1 44.675,21.3 44.95,21.575
  Bottom Layer 1 w0.5: 44.95,20.25 44.95,20.581 44.95,20.913 44.95,21.575 45.5,22.125 v1(46.85,22.125) v1(46.85,23.2)
ANALOG1: C3.2 DD1.23 R7.2 R10.2 | length 65.2
  Top Layer 1 w0.15: DD1.23 8.987,13.088 10.387,13.088 v1(10.4,13.075)
  Bottom Layer 1 w0.15: C3.2 11.925,14.55 10.45,13.075 v1(10.4,13.075) 9.725,12.4 6.8,12.4 5.5,11.1 5.5,4.9 9.575,0.825 41.332,0.825 47.175,6.668 47.175,8.3 47.875,9 R10.2 R7.2
ANALOG2: C1.2 DD1.25 R8.2 R9.2 | length 61.7
  Top Layer 1 w0.15: DD1.25 v1(10.375,12.1)
  Bottom Layer 1 w0.15: v1(10.375,12.1) v1@10.4,12.1 ; C1.2 11.925,13 11.025,12.1 v1@10.4,12.1 ; R8.2 R9.2 46.425,9 45.725,8.3 45.725,6.718 40.107,1.1 9.893,1.1 6,4.993 6,10.911 6.989,11.9 10.2,11.9 v1@10.4,12.1
BDSHOT1: DD2.9 R11_1.2 R13_1.1 VT2_1.3 XP2.30 | length 35.6
  Top Layer 1 w0.15: DD2.9 31.73,8.63 33.025,9.925 v1(37.9,9.925)
  Bottom Layer 1 w0.15: R11_1.2 R13_1.1 23.295,6.125 24.656,4.764 VT2_1.3 26.508,5.45 28.95,5.45 30.5,3.9 31.875,3.9 v1(37.9,9.925) ; v1@37.96,9.925 37.96,9.985 38.3,10.325 38.3,14 40,15.7 XP2.30
BDSHOT2: DD2.3 R11_2.2 R13_2.1 VT2_2.3 XP2.26 | length 22.9
  Top Layer 1 w0.15: v1(37.459,11.395) 37.545,11.481 37.791,11.481 38.08,11.77 DD2.3
  Bottom Layer 1 w0.15: R11_2.2 R13_2.1 28.9,6.1 30.261,4.739 31.514,4.739 37.459,10.684 v1(37.459,11.395) ; v1@37.4,11.425 37.459,11.484 37.459,13.859 40.1,16.5 XP2.26
BDSHOT3: DD4.14 R11_3.2 R13_3.1 VT2_3.3 XP2.38 | length 51.8
  Top Layer 1 w0.15: DD4.14 38.055,14.587 38.367,14.275 v1(42.292,14.275)
  Bottom Layer 1 w0.15: R11_3.2 R13_3.1 7.35,6.25 8.711,4.889 VT2_3.3 10.436,4.889 13.125,2.2 34.1,2.2 40.525,8.625 40.525,13.885 40.74,14.1 41.625,14.1 41.825,14.3 42.267,14.3 v1(42.292,14.275)
BDSHOT4: DD2.7 R11_4.2 R13_4.1 VT2_4.3 XP2.24 | length 13.4
  Top Layer 1 w0.15: v1(32.959,14.14) 32.98,14.119 32.98,12.546 DD2.7
  Bottom Layer 1 w0.15: v1(32.959,14.14) 32.959,14.156 VT2_4.3 34.8,13.875 36.041,13.875 R13_4.1 ; R11_4.2 R13_4.1 ; XP2.24 39.742,16.9 36.416,13.575 R13_4.1
BDSHOT5: DD2.14 R11_5.2 R13_5.1 VT2_5.3 XP2.36 | length 42.3
  Top Layer 1 w0.15: DD2.14 38.08,8.222 38.826,8.968 39.343,8.968 40,9.625 v1(40,9.7)
  Bottom Layer 1 w0.15: R11_5.2 R13_5.1 12.716,6.125 14.077,4.764 VT2_5.3 16.661,4.764 18.625,2.8 33.6,2.8 39.525,8.725 39.525,9.107 40,9.582 v1(40,9.7) 39.975,9.725 39.975,14.075 40.4,14.5 XP2.36
BDSHOT6: DD2.11 R11_6.2 R13_6.1 VT2_6.3 XP2.32 | length 40.7
  Top Layer 1 w0.15: DD2.11 34.27,8.601 35.094,9.425 39.1,9.425 39.475,9.8 v1(39.475,10.4)
  Bottom Layer 1 w0.15: R11_6.2 R13_6.1 18.067,6.083 19.428,4.722 VT2_6.3 20.9,4.416 21.916,3.4 33.075,3.4 39.475,9.8 v1(39.475,10.4) ; v1@39.5,10.4 39.4,10.5 39.4,14.3 40.4,15.3 XP2.32
BDSHOT7: DD4.9 R11_7.2 R13_7.1 VT2_7.3 XP2.20 | length 18.2
  Top Layer 1 w0.15: v1(29.975,15.175) 31.493,15.175 31.705,15.387 DD4.9
  Bottom Layer 1 w0.15: R11_7.2 R13_7.1 29.875,13.75 29.875,14.953 29.975,15.054 v1(29.975,15.175) 30.059,15.175 31.217,16.333 31.217,16.592 32.75,18.125 39.007,18.125 39.432,17.7 XP2.20
BDSHOT8: DD4.3 R11_8.2 R13_8.1 VT2_8.3 XP2.18 | length 18.1
  Top Layer 1 w0.15: v1(37.302,19.364) 37.316,19.377 37.677,19.377 38.055,19.755 DD4.3
  Bottom Layer 1 w0.15: R11_8.2 R13_8.1 29.889,18.948 29.889,20.189 VT2_8.3 35,21.25 36.825,19.425 37.241,19.425 v1(37.302,19.364) 38.361,19.364 39.625,18.1 XP2.18
BDSHOT9: DD4.5 R11_9.2 R13_9.1 VT2_9.3 XP2.14 | length 19.6
  Top Layer 1 w0.15: v1(35.5,22.75) 35.507,22.743 35.507,21.008 DD4.5
  Bottom Layer 1 w0.15: R11_9.2 R13_9.1 29.85,24.125 29.85,25.366 VT2_9.3 31.848,26.402 v1(35.5,22.75) 39.35,18.9 XP2.14
BDSHOT10: DD4.7 R11_10.2 R13_10.1 VT2_10.3 XP2.12 | length 28
  Top Layer 1 w0.15: DD4.7 32.975,22.313 33.937,23.275 37.125,23.275 v1(37.45,22.95)
  Bottom Layer 1 w0.15: R11_10.2 R13_10.1 29.85,29.525 29.85,30.766 VT2_10.3 37.45,25.239 v1(37.45,22.95) 37.45,22.217 40.367,19.3 XP2.12
BUTTON: C14.2 DD1.29 R1.1 S1.1 | length 21.7
  Top Layer 1 w0.15: DD1.29 12.2,9.8 14.37,7.63 14.37,7.297 17.568,4.1 19.257,4.1 20.557,2.8 R1.1 27.45,2.8 C14.2 30.125,2.975 S1.1
DIG_INP: DD1.26 R14.2 R15.2 VD3.2 | length 49.7
  Top Layer 1 w0.15: DD1.26 10.7,9.944 10.631,9.875 10.306,9.875 9.8,9.369 9.8,7.675 10.25,7.225 10.825,7.225 11.4,6.65 v1(11.4,3.2)
  Top Layer w0.15: v1(11.4,3.2) 13.7,0.9 38.8,0.9 v1(41.6,3.7)
  Bottom Layer 1 w0.15: v1(41.6,3.7) 42.8,4.9 42.8,7.9 43.65,8.75 VD3.2 44.95,8.85 R15.2 R14.2
DSHOT_IN1: DD1.42 DD2.10 | length 19
  Top Layer 1 w0.15: DD1.42 18.7,7.9 20.8,5.8 32.6,5.8 33,6.2 DD2.10
DSHOT_IN2: DD1.45 DD2.2 | length 25.6
  Top Layer 1 w0.15: DD1.45 20.2,7.3 21.1,6.4 28.6,6.4 32.7,10.5 38.122,10.5 39.35,11.728 DD2.2
DSHOT_IN3: DD1.89 DD4.15 | length 38.9
  Top Layer 1 w0.15: DD1.89 16.2,26.418 15.95,26.668 15.95,27.157 16.393,27.6 22.675,27.6 24.1,26.175 27.375,26.175 28.253,25.297 41.41,25.297 42.2,24.507 42.2,22.04 41.425,21.265 41.425,18.797 39.325,16.697 DD4.15
DSHOT_IN4: DD1.48 DD2.6 | length 14.5
  Top Layer 1 w0.15: DD1.48 21.7,10.945 22.055,11.3 22.845,11.3 23.145,11 33.542,11 34.27,11.728 DD2.6
DSHOT_IN5: DD1.32 DD2.15 | length 30.5
  Top Layer 1 w0.15: DD1.32 13.7,9.5 15.8,7.4 17.3,7.4 20.1,4.6 37.838,4.6 39.35,6.112 DD2.15
DSHOT_IN6: DD1.36 DD2.12 | length 24.6
  Top Layer 1 w0.15: DD1.36 15.7,8.843 16.493,8.05 17.65,8.05 20.5,5.2 34.6,5.2 35.54,6.14 DD2.12
DSHOT_IN7: DD1.60 DD4.10 | length 10.3
  Top Layer 1 w0.15: DD1.60 25.825,16.6 26.725,17.5 32.569,17.5 32.975,17.094 DD4.10
DSHOT_IN8: DD1.62 DD4.2 | length 17.1
  Top Layer 1 w0.15: DD1.62 25,17.6 25.6,18.2 37.836,18.2 39.325,19.689 DD4.2
DSHOT_IN9: DD1.64 DD4.4 | length 14.1
  Top Layer 1 w0.15: DD1.64 24.476,18.651 25.047,18.651 25.296,18.9 35.9,18.9 36.785,19.785 DD4.4
DSHOT_IN10: DD1.66 DD4.6 | length 10.9
  Top Layer 1 w0.15: DD1.66 33.642,19.6 34.245,20.203 DD4.6
DSHOT_OUT1: DD1.40 R11_1.1 R12_1.1 VD2_1.2 | length 12.8
  Top Layer 1 w0.15: v1(17.689,11.559) 17.7,11.548 DD1.40
  Bottom Layer 1 w0.15: v1(17.689,11.559) 18.173,11.075 23.395,11.075 R12_1.1@24.895,9.575 ; R11_1.1 24.02,8.7 R12_1.1@24.895,9.575 ; VD2_1.2 26.445,9.575 R12_1.1 R12_1.1@24.895,9.575
DSHOT_OUT2: DD1.44 R11_2.1 R12_2.1 VD2_2.2 | length 15.5
  Top Layer 1 w0.15: v1(19.675,11.775) 19.687,11.763 19.687,10.388 DD1.44
  Bottom Layer 1 w0.15: v1(19.675,11.775) 26.125,11.775 28.375,9.525 R11_2.1 29.175,8.675 30.05,9.55 31.6,9.55 VD2_2.2
DSHOT_OUT3: DD1.30 R11_3.1 R12_3.1 VD2_3.2 | length 7.7
  Top Layer 1 w0.15: v1(12.325,11.625) 12.7,11.25 DD1.30
  Bottom Layer 1 w0.15: R11_3.1 8.075,8.825 8.95,9.7 R12_3.1 10.5,9.7 VD2_3.2 10.525,9.825 v1(12.325,11.625)
DSHOT_OUT4: DD1.47 R11_4.1 R12_4.1 VD2_4.2 | length 18.7
  Top Layer 1 w0.15: DD1.47 21.225,10.4 21.225,12.25 v1(21.25,12.275)
  Bottom Layer 1 w0.15: v1(21.25,12.275) 21.33,12.275 21.555,12.05 26.55,12.05 28.225,10.375 32.916,10.375 33.091,10.2 VD2_4.2 ; VD2_4.2@32.916,9.925 VD2_4.2 ; R11_4.1@36.416,11 R11_4.1 36.016,10.675 35.216,10.675 34.641,10.1 VD2_4.2
DSHOT_OUT5: DD1.31 R11_5.1 R12_5.1 VD2_5.2 | length 7.5
  Top Layer 1 w0.15: DD1.31 13.213,10.388 13.213,11.663 v1(13.225,11.675)
  Bottom Layer 1 w0.15: R11_5.1 13.441,8.7 14.316,9.575 R12_5.1 ; v1(13.225,11.675) 14.391,10.509 R12_5.1 ; VD2_5.2 15.866,9.575 R12_5.1
DSHOT_OUT6: DD1.35 R11_6.1 R12_6.1 VD2_6.2 | length 9
  Top Layer 1 w0.15: DD1.35 15.212,10.388 15.212,11.613 v1(15.225,11.625)
  Bottom Layer 1 w0.15: v1(15.225,11.625) 15.311,11.539 15.311,11.264 17.917,8.658 R11_6.1 18.792,8.658 19.667,9.533 21.217,9.533 VD2_6.2
DSHOT_OUT7: DD1.59 R11_7.1 R12_7.1 VD2_7.2 | length 5.4
  Top Layer 1 w0.15: DD1.59 24.438,16.088 25.537,16.088 v1(25.55,16.075)
  Bottom Layer 1 w0.15: v1(25.55,16.075) 26.075,16.075 ; VD2_7.2@26.075,16.675 26.075,16.075 ; R11_7.1@26.975,13.35 R11_7.1 26.65,13.75 26.65,14.55 26.075,15.125 26.075,16.075
DSHOT_OUT8: DD1.61 R11_8.1 R12_8.1 VD2_8.2 | length 9.2
  Top Layer 1 w0.15: v1(23.05,17.05) 23.075,17.075 24.4,17.075 DD1.61
  Bottom Layer 1 w0.15: v1(23.05,17.05) 23.525,17.05 24.723,18.248 R11_8.1@26.689,18.248 ; VD2_8.2 26.114,20.348 26.689,19.773 26.689,18.973 R11_8.1 R11_8.1@27.014,18.573
DSHOT_OUT9: DD1.63 R11_9.1 R12_9.1 VD2_9.2 | length 13.8
  Top Layer 1 w0.15: v1(23.05,18.05) 23.075,18.075 24.4,18.075 DD1.63
  Bottom Layer 1 w0.15: v1(23.05,18.05) 23.136,18.136 23.136,18.387 23.2,18.451 23.2,22.6 R12_9.1@26.075,25.475 ; VD2_9.2 26.05,25.5 26.625,24.925 26.625,24.125 R11_9.1 R11_9.1@26.95,23.725
DSHOT_OUT10: DD1.65 R11_10.1 R12_10.1 VD2_10.2 | length 18
  Top Layer 1 w0.15: v1(22.175,19.075) 22.187,19.088 24.412,19.088 DD1.65
  Bottom Layer 1 w0.15: v1(22.175,19.075) 22.175,24.35 26.95,29.125 R11_10.1 26.625,29.525 26.625,30.325 26.05,30.9 VD2_10.2
GND: C1.1 C2.1 C3.1 C4.1 C5.1 C6.1 C7.1 C8.1 C9.1 C10.1 C11.1 C12.1 C13.1 C14.1 C15.1 C16.1 C17.1 D1.1 D2.2 DD1.10 DD1.20 DD1.27 DD1.74 DD1.99 DD2.8 DD3.8 DD4.8 R2.1 R3.1 R5.1 R6.1 R9.1 R10.1 R15.1 S1.2 S2.2 VD1.1 VD2_1.1 VD2_2.1 VD2_3.1 VD2_4.1 VD2_5.1 VD2_6.1 VD2_7.1 VD2_8.1 VD2_9.1 VD2_10.1 VD3.1 VT2_1.2 VT2_2.2 VT2_3.2 VT2_4.2 VT2_5.2 VT2_6.2 VT2_7.2 VT2_8.2 VT2_9.2 VT2_10.2 XP1.6 XP2.9 XP2.10 XP2.15 XP2.16 XP2.21 XP2.22 XP2.27 XP2.28 XP2.31 XP2.34 XP2.35 XP2.39 XP2.40 ZQ1.3 | length 87
  Top Layer 1 w0.15: R3.1@1.55,28.75 v1(1.55,29.6) ; v1(1.575,23.525) 1.575,24.35 R2.1 ; C14.1 28.795,1.375 29.02,1.6 v1(29.1,1.6) ; R6.1 46.5,8.6 v1(46.5,6.7)
  Top Layer 1 w0.2: R3.1 R3.1@1.55,28.75 ; C10.1@6.925,14.775 C10.1 7.15,14.6 DD1.20 ; C8.1 7.025,21.15 7.375,20.8 7.375,20.595 7.759,20.211 8.351,19.619 8.956,19.619 DD1.10 ; C15.1 9.592,6.6 9.792,6.8 v1(9.9,6.8) ; C11.1@10.65,8.275 C11.1 10.65,8.425 11.2,8.975 DD1.27 ; DD1.99 11.2,27.225 11.75,27.775 C7.1 ; S2.2 v1(17.5,3) ; DD1.74 25.825,23.6 26.375,23.05 C5.1 ; S1.2 v1(39.05,3)
  Top Layer 1 w0.3: v1(2.175,16.875) 3.075,16.875 ZQ1.3@3.1,16.85 ; v1(2.55,15.125) 3.375,15.125 C6.1 ; v1(4.5,11.6) C2.1 ; v1(4.55,13.35) C4.1 ; ZQ1.3@4.95,19.15 v1(5.875,19.15) ; C9.1 v1(5,21.8) ; v1(6.025,14.775) C10.1@6.925,14.775 ; v1(6.925,22.05) 6.925,21.175 C8.1 ; C11.1@10.65,8.275 11.493,7.432 11.618,7.432 v1(11.675,7.375) ; C7.1 v1(11.75,28.8) ; v1(23.85,9.625) 24.2,9.275 24.2,8.65 C12.1 ; C5.1 26.75,22.75 27.419,22.75 27.519,22.65 v1(27.6,22.65) ; C13.1 27.25,8.35 v1(27.25,9.45) ; v1(31.7,22.525) 31.702,22.523 31.702,21.003 DD4.8 ; DD2.8 31.74,12.536 31.74,14.065 v1(31.75,14.075) ; v1(31.775,33.325) 31.778,33.323 31.778,31.703 DD3.8 ; v1(49.025,18.2) VD1.1
  Top Layer 1 w0.5: D1.1 43.312,22.387 D1.1@43.312,22.912 ; D1.1@43.3,22.875 43.3,22.9 D1.1@43.312,22.912 ; v1(43.325,24.1) 43.312,24.087 D1.1@43.312,22.912 ; v1(44.15,23.1) 43.5,23.1 D1.1@43.312,22.912 ; v1(45.275,16) C17.1 C17.1@46.151,16.95 ; C16.1 47.825,18.7 48.025,18.5 48.025,17.977 48.1,17.902 v1(48.1,17.875)
  Bottom Layer 1 w0.15: C1.1 13.55,13.05 v1(14.4,13.05) ; C3.1 13.6,14.55 v1(14.425,14.55) ; XP2.40 41.17,13.675 41.9,13.675 v1(41.925,13.65) ; XP2.34 v1(41.925,14.9) ; XP2.28 v1(41.925,16.1) ; XP2.22 v1(41.925,17.3) ; XP2.16 v1@41.9,18.5 ; XP2.10 v1(41.925,19.7) ; v1(43.05,15.3) XP2.31 ; v1(43.05,16.1) XP2.27 ; v1(43.05,17.3) XP2.21 ; v1(43.05,18.475) 43.062,18.487 43.842,18.487 XP2.15 ; v1@43.15,13.675 43.175,13.7 XP2.39 ; v1@43.21,14.5 XP2.35 ; v1(43.6,6.8) 43.6,7.7 VD3.1 ; XP2.9 44.373,19.7 v1(44.775,19.298) ; v1(45,6.7) 45,7.6 R15.1 ; v1(46.5,6.7) R9.1 ; v1(47.9,6.7) 47.9,7.65 R10.1
  Bottom Layer 1 w0.2: v1(23.75,30.425) 23.75,29.375 R5.1
  Bottom Layer 1 w0.3: v1(9.9,6.8) 9.9,7.9 10.425,8.425 10.425,8.525 VD2_3.1 ; v1(10.8,6.3) 10.815,6.315 10.815,7.16 VT2_3.2 ; v1(14.475,29) 14.488,28.988 15.513,28.988 D2.2 ; VD2_5.1 15.916,8.525 16.675,8.525 v1(16.7,8.55) ; v1(16.175,6.2) 16.185,6.21 16.185,7.04 VT2_5.2 ; v1(20.775,7.75) 21.142,8.117 21.142,8.358 VD2_6.1 ; VT2_6.2 21.551,7.004 22.316,7.004 v1(22.32,7) ; VD2_1.1 26.47,8.4 25.875,7.805 v1(25.875,7) 25.9,7.025 26.75,7.025 VT2_1.2 ; v1(27.125,33.2) 27.137,33.188 27.137,32.463 VD2_10.1 ; VD2_9.1 27.25,27.05 27.643,26.657 27.868,26.657 v1(27.925,26.6) ; VD2_7.1 27.275,16.775 27.643,16.407 27.643,16.132 v1(27.7,16.075) ; VD2_8.1 27.229,21.898 27.329,21.998 27.329,22.298 27.6,22.569 v1(27.6,22.65) ; VT2_9.2 28.603,27.353 29.498,27.353 v1(29.5,27.35) ; VT2_10.2 v1(28.6,33.65) ; VT2_7.2 28.637,16.967 28.637,16.163 v1(28.65,16.15) ; VT2_8.2 29.392,21.475 v1(29.45,21.475) ; v1(30.995,7.692) 30.995,7.745 31.625,8.375 VD2_2.1 ; v1(31.001,6.675) 31.004,6.675 31.321,6.992 31.699,6.992 31.732,7.025 VT2_2.2 ; VT2_4.2 VT2_4.2@32.786,12.893 ; VD2_4.1 33.091,12.588 VT2_4.2@32.786,12.893 ; v1(33.675,14.025) 32.786,13.136 VT2_4.2@32.786,12.893
  other v1: 20.4,3.9 40.025,8.9 38.775,9.95 43.05,13.675 22.1,14.2 43.05,14.5 29.975,15.925 41.925,18.5 36.725,18.925 20.925,22.625 36.525,22.65 41.7,23.575 19.175,24.575 17.375,27.025
LED_ERROR: DD1.8 HL1.1 | length 9.7
  Top Layer 1 w0.15: HL1.1 v1(7.1,25.675) ; DD1.8 10.043,20.6 v1(10.454,20.188)
  Bottom Layer 1 w0.15: v1(7.1,25.675) 7.1,23.543 v1(10.454,20.188)
LED_OK: DD1.7 HL2.1 | length 10.5
  Top Layer 1 w0.15: HL2.1 6,27.8 v1(7.125,27.8) ; DD1.7 10.059,21.1 v1(10.508,21.549)
  Bottom Layer 1 w0.15: v1(7.125,27.8) 10.508,24.417 v1(10.508,21.549)
NetC6_2: C6.2 DD1.13 ZQ1.1 | length 6.4
  Top Layer 1 w0.2: C6.2 4.95,15.15 4.95,16.975 5.375,17.4 6.514,17.4 7.214,18.1 DD1.13
NetC9_2: C9.2 DD1.12 ZQ1.2 | length 8.3
  Top Layer 1 w0.2: C9.2 3.4,19.45 ZQ1.2 3.1,19.025 3.925,18.2 5.864,18.2 6.264,18.6 DD1.12
NetHL1_2: HL1.2 R2.2 | length 2.4
  Top Layer 1 w0.15: R2.2 3.95,25.7 HL1.2
NetHL2_2: HL2.2 R3.2 | length 2.6
  Top Layer 1 w0.15: R3.2 3.575,27.425 HL2.2
NetHL3_2: HL3.2 R6.2 | length 2
  Top Layer 1 w0.15: HL3.2 46.925,10.55 47.55,9.925 R6.2
NetR5_2: R5.2 VT1.1 | length 1.7
  Bottom Layer 1 w0.2: VT1.1 22.875,28.05 R5.2
NetR12_1_2: R12_1.2 VT2_1.1 | length 1.3
  Bottom Layer 1 w0.15: VT2_1.1 24.97,7.15 R12_1.2
NetR12_2_2: R12_2.2 VT2_2.1 | length 1.3
  Bottom Layer 1 w0.15: VT2_2.1 30.125,7.125 R12_2.2
NetR12_3_2: R12_3.2 VT2_3.1 | length 1.3
  Bottom Layer 1 w0.15: VT2_3.1 8.925,8.3 R12_3.2
NetR12_4_2: R12_4.2 VT2_4.1 | length 1.3
  Bottom Layer 1 w0.15: R12_4.2 34.691,11.525 VT2_4.1
NetR12_5_2: R12_5.2 VT2_5.1 | length 1.3
  Bottom Layer 1 w0.15: VT2_5.1 14.391,7.15 R12_5.2
NetR12_6_2: R12_6.2 VT2_6.1 | length 1.3
  Bottom Layer 1 w0.15: VT2_6.1 19.742,7.108 R12_6.2
NetR12_7_2: R12_7.2 VT2_7.1 | length 1.3
  Bottom Layer 1 w0.15: R12_7.2 28.525,15.175 VT2_7.1
NetR12_8_2: R12_8.2 VT2_8.1 | length 1.3
  Bottom Layer 1 w0.15: R12_8.2 28.564,20.398 VT2_8.1
NetR12_9_2: R12_9.2 VT2_9.1 | length 1.3
  Bottom Layer 1 w0.15: R12_9.2 28.5,25.55 VT2_9.1
NetR12_10_2: R12_10.2 VT2_10.1 | length 1.3
  Bottom Layer 1 w0.15: R12_10.2 28.5,30.95 VT2_10.1
NetR14_1: R14.1 XP2.37 | length 3.5
  Bottom Layer 1 w0.15: XP2.37 43.88,14.075 44.525,14.075 45.05,13.55 R14.1
NetVT1_3: VT1.3 XP1.1 | length 2.2
  Bottom Layer 1 w0.3: VT1.3 21.361,29.775 21.361,31.961 XP1.1
PWM1: DD3.2 XP2.25 | length 24.7
  Top Layer 1 w0.15: DD3.2 39.412,31.688 39.412,30.188 v1(39.425,30.175)
  Bottom Layer 1 w0.15: v1(39.425,30.175) 39.511,30.089 39.786,30.089 41.375,28.5 46.7,28.5 48.7,26.5 48.7,20.7 44.5,16.5 XP2.25
PWM2: DD3.4 XP2.23 | length 26.2
  Top Layer 1 w0.15: DD3.4 36.868,31.693 36.868,30.133 v1(36.875,30.125)
  Bottom Layer 1 w0.15: v1(36.875,30.125) 38.768,30.125 40.793,28.1 46.5,28.1 48.3,26.3 48.3,20.8 44.4,16.9 XP2.23
PWM3: DD3.15 XP2.19 | length 21.4
  Top Layer 1 w0.15: DD3.15 v1(39.4,28.125)
  Bottom Layer 1 w0.15: v1(39.4,28.125) 39.825,27.7 46.3,27.7 47.875,26.125 47.875,20.875 44.7,17.7 XP2.19
PWM4: DD3.12 XP2.17 | length 24.1
  Top Layer 1 w0.15: v1(35.575,28.125) 35.582,28.118 35.582,26.607 DD3.12
  Bottom Layer 1 w0.15: v1(35.575,28.125) 38.693,28.125 39.518,27.3 46.1,27.3 47.5,25.9 47.5,21 44.6,18.1 XP2.17
RESET: C15.2 DD1.14 R4.1 S2.1 | length 25.2
  Top Layer 1 w0.15: v1(5,6.1) 5.5,6.6 C15.2 6.6,5.23 R4.1 6.755,3.845 7.6,3 S2.1 ; DD1.14@9.55,17.6 DD1.14 8.988,17.588 10.312,17.588 v1(10.325,17.575)
  Bottom Layer 1 w0.15: v1@5,6.05 3.825,7.225 3.801,7.225 3.675,7.351 3.675,13.3 7.95,17.575 v1(10.325,17.575)
SWCLOCK: D2.6 DD1.76 XP1.3 | length 13.3
  Top Layer 1 w0.15: v1(19.9,24.55) 22,24.55 22.643,25.193 22.643,25.768 DD1.76
  Bottom Layer 1 w0.15: XP1.3 16.295,31.647 16.971,30.971 16.971,28.579 17.525,28.025 D2.6 17.85,28.05 18.613,28.05 19.9,26.763 v1(19.9,24.55)
SWDIO: D2.4 DD1.72 XP1.2 | length 14.8
  Top Layer 1 w0.15: v1(21.65,22.612) 21.656,22.606 24.419,22.606 DD1.72
  Bottom Layer 1 w0.15: XP1.2 18.835,31.939 17.825,30.929 D2.4 18.125,29.925 18.994,29.925 21.65,27.269 v1(21.65,22.612)
TIM9_CH1: DD1.4 DD3.3 | length 38.6
  Top Layer 1 w0.15: DD1.4 8.4,22.6 7.95,23.05 7.95,27.9 9.55,29.5 37.325,29.5 38.13,30.305 DD3.3
TIM9_CH2: DD1.5 DD3.5 | length 37
  Top Layer 1 w0.15: DD1.5 8.4,22.1 7.625,22.875 7.625,28.025 9.375,29.775 34.922,29.775 35.59,30.443 DD3.5
TIM12_CH1: DD1.53 DD3.14 | length 48.1
  Top Layer 1 w0.15: v1(12.75,27.275) 12.872,27.275 13.071,27.474 13.117,27.474 13.393,27.75 13.932,27.75 15.007,28.825 37.1,28.825 38.13,27.795 DD3.14 ; v1(21.6,13.5) 22,13.1 DD1.53
  Bottom Layer 1 w0.15: v1(12.75,27.275) 12.75,22.35 v1(21.6,13.5)
TIM12_CH2: DD1.54 DD3.11 | length 41.4
  Top Layer 1 w0.15: v1(13.6,27.25) 13.722,27.25 13.895,27.423 13.994,27.423 15.121,28.55 33.65,28.55 34.32,27.88 DD3.11 ; v1(22.8,14.7) 22.886,14.614 22.886,14.351 23.637,13.6 DD1.54
  Bottom Layer 1 w0.15: v1(13.6,27.25) 13.6,23.9 v1(22.8,14.7)
UART1_RX: DD1.69 XP2.11 | length 24.7
  Top Layer 1 w0.15: DD1.69 27.3,21.1 30.1,23.9 33.3,23.9 33.45,24.05 41.328,24.05 41.578,24.3 v1(41.7,24.3)
  Bottom Layer 1 w0.15: v1(41.7,24.3) 42.8,23.2 42.8,19.98 43.455,19.325 43.83,19.325 XP2.11
UART1_TX: DD1.68 XP2.13 | length 23.9
  Top Layer 1 w0.15: DD1.68 27.675,20.6 30.625,23.55 v1(40.975,23.55)
  Bottom Layer 1 w0.15: v1(40.975,23.55) 42.175,22.35 42.175,20.157 43.432,18.9 XP2.13
UART2_RX: D2.1 DD1.87 XP1.5 | length 9.4
  Top Layer 1 w0.15: v1(16.475,26.975) 16.561,26.889 16.711,26.889 17.2,26.4 DD1.87
  Bottom Layer 1 w0.15: XP1.5 11.215,31.553 14.743,28.025 15.825,28.025 16.389,27.461 16.389,27.061 v1(16.475,26.975)
UART2_TX: D2.3 DD1.86 XP1.4 | length 9.3
  Top Layer 1 w0.15: DD1.86 17.7,26.441 18.15,26.891 v1(18.15,26.975)
  Bottom Layer 1 w0.15: XP1.4 13.755,30.745 14.575,29.925 15.825,29.925 16.596,29.154 16.596,27.904 16.975,27.525 17.6,27.525 v1(18.15,26.975)
Vbat1: R7.1 XP2.29 | length 6.2
  Bottom Layer 1 w0.15: XP2.29 44.3,15.7 47.55,12.45 47.55,11.825 47.875,11.5 R7.1
Vbat2: R8.1 XP2.33 | length 4.8
  Bottom Layer 1 w0.15: XP2.33 44.4,14.9 46.5,12.8 R8.1
pads on no net: DD1.1 DD1.2 DD1.3 DD1.9 DD1.15 DD1.16 DD1.17 DD1.18 DD1.24 DD1.33 DD1.34 DD1.37 DD1.38 DD1.39 DD1.41 DD1.43 DD1.46 DD1.49 DD1.51 DD1.52 DD1.55 DD1.56 DD1.57 DD1.58 DD1.67 DD1.70 DD1.71 DD1.73 DD1.77 DD1.78 DD1.79 DD1.80 DD1.81 DD1.82 DD1.83 DD1.84 DD1.85 DD1.88 DD1.90 DD1.91 DD1.92 DD1.93 DD1.94 DD1.95 DD1.96 DD1.97 DD1.98 DD2.4 DD2.5 DD2.13 DD2.16 DD3.6 DD3.7 DD3.9 DD3.10 DD3.13 DD3.16 DD4.11 DD4.12 DD4.13 DD4.16 XP2.S1 XP2.S2 XP2.S3 XP2.S4

## Polygon pours and split planes (outlines as drawn)
+3,3В on Bottom Layer 1 "+3,3В_L04_P011" (solid, remove dead copper, pour order 11): 0,3 0,32 cw(c3,32) 3,35 47,35 cw(c47,32) 50,32 50,3 cw(c47.25,2.75) 47.5,0 3,0 cw(c3,3)
GND on Top Layer "GND_L02_P009" (solid, remove dead copper, pour order 9): 0,3 0,32 cw(c3,32) 3,35 47,35 cw(c47,32) 50,32 50,3 cw(c47.25,2.75) 47.5,0 3,0 cw(c3,3)
GND on Bottom Layer "GND_L03_P010" (solid, remove dead copper, pour order 10): 0,3 0,32 cw(c3,32) 3,35 47,35 cw(c47,32) 50,32 50,3 cw(c47.25,2.75) 47.5,0 3,0 cw(c3,3)
+3,3В on Top Layer 1 "+3,3В_L01_P008" (solid, remove dead copper, pour order 8): 0,3 0,32 cw(c3,32) 3,35 47,35 cw(c47,32) 50,32 50,3 cw(c47.25,2.75) 47.5,0 3,0 cw(c3,3)

## Keep-outs
Keep-Out Layer:
  circle w0.254: c3,32 r2
  circle w0.254: c47,32 r2
  circle w0.254: c47,3 r2
  circle w0.254: c3,3 r2

## Silkscreen, mask and mechanical layers (free items; w line width, h text height)
Top Overlay:
  text "GND" at 6.649,33.293 h1.5
  text "RX" at 10.293,33.303 h1.5
  text "TX" at 12.574,33.303 h1.5
  text "CLK" at 14.95,33.303 h1.5
  text "DIO" at 17.95,33.303 h1.5
  text "+3B3" at 20.885,33.303 h1.5
  text "OK" at 4.124,29.147 h2
  text "ERR" at 2.722,22.632 h2
  text "PWR" at 44.831,5.75 h2
  text "BTN" at 39.588,2.066 h2
  text "RESET" at 18.164,1.195 h2
Bottom Overlay:
  drawing of 3 lines, arcs and shapes, not listed
  text "Hydronautics" at 44.05,32.033 h1
  text "VMA_SAUVC26" at 16.05,23.117 h1
  text "Version 1.0" at 15.55,20.2 h1
  text "Developed by Gleb M." at 20.55,17.533 h1
Board Shape:
  the board outline again, w0.2